# EAGLE board qo-100-pa-driver (EAGLE 9.6.2)
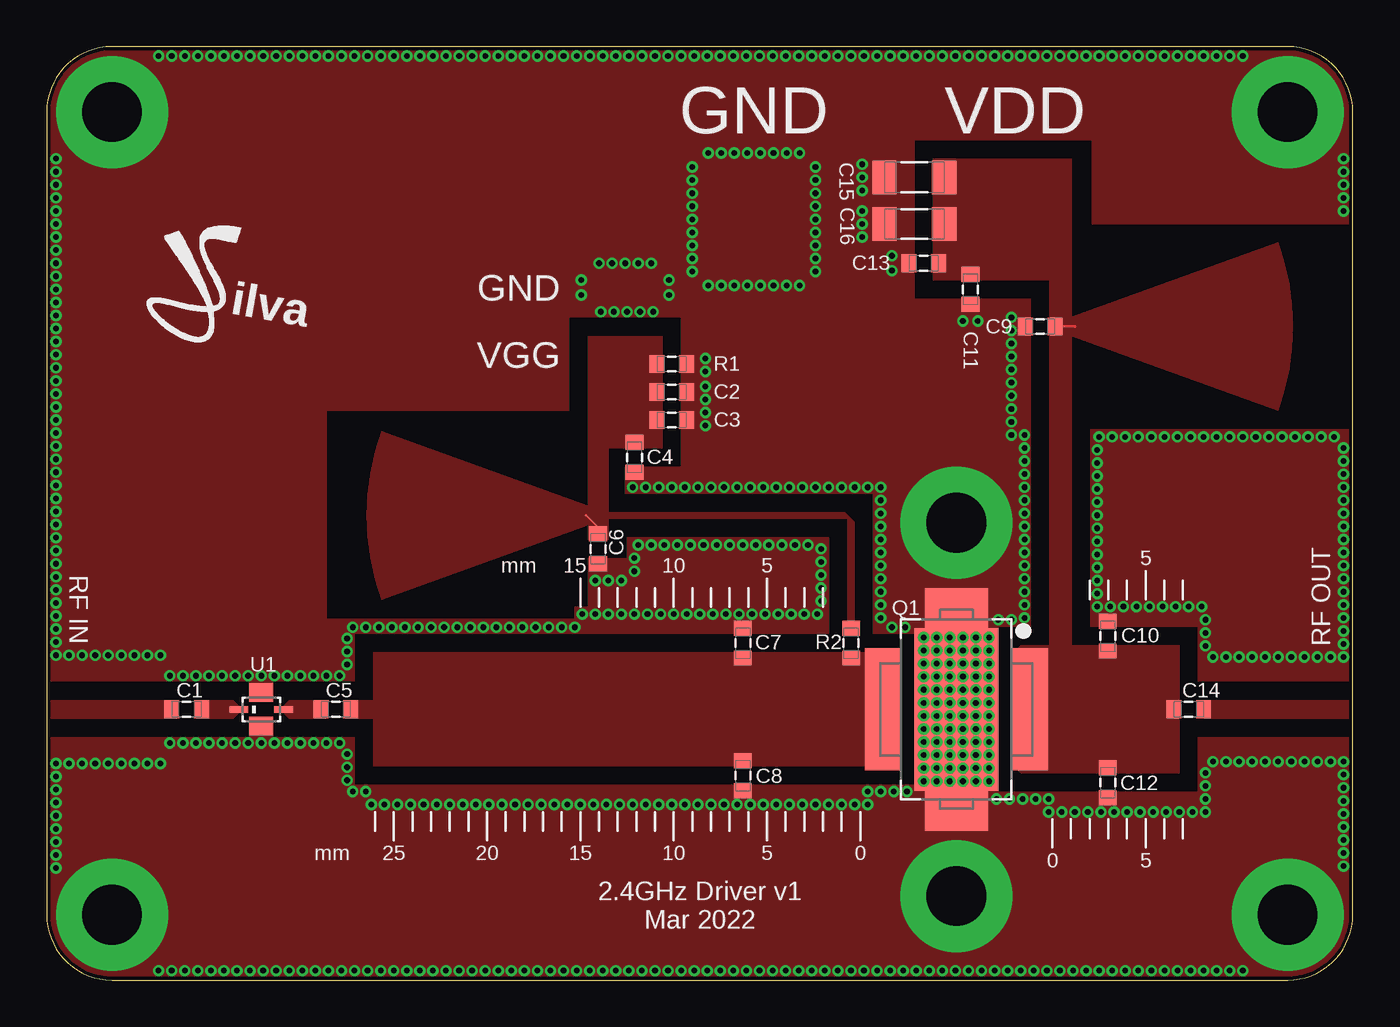
[diagram p0: board, top side]
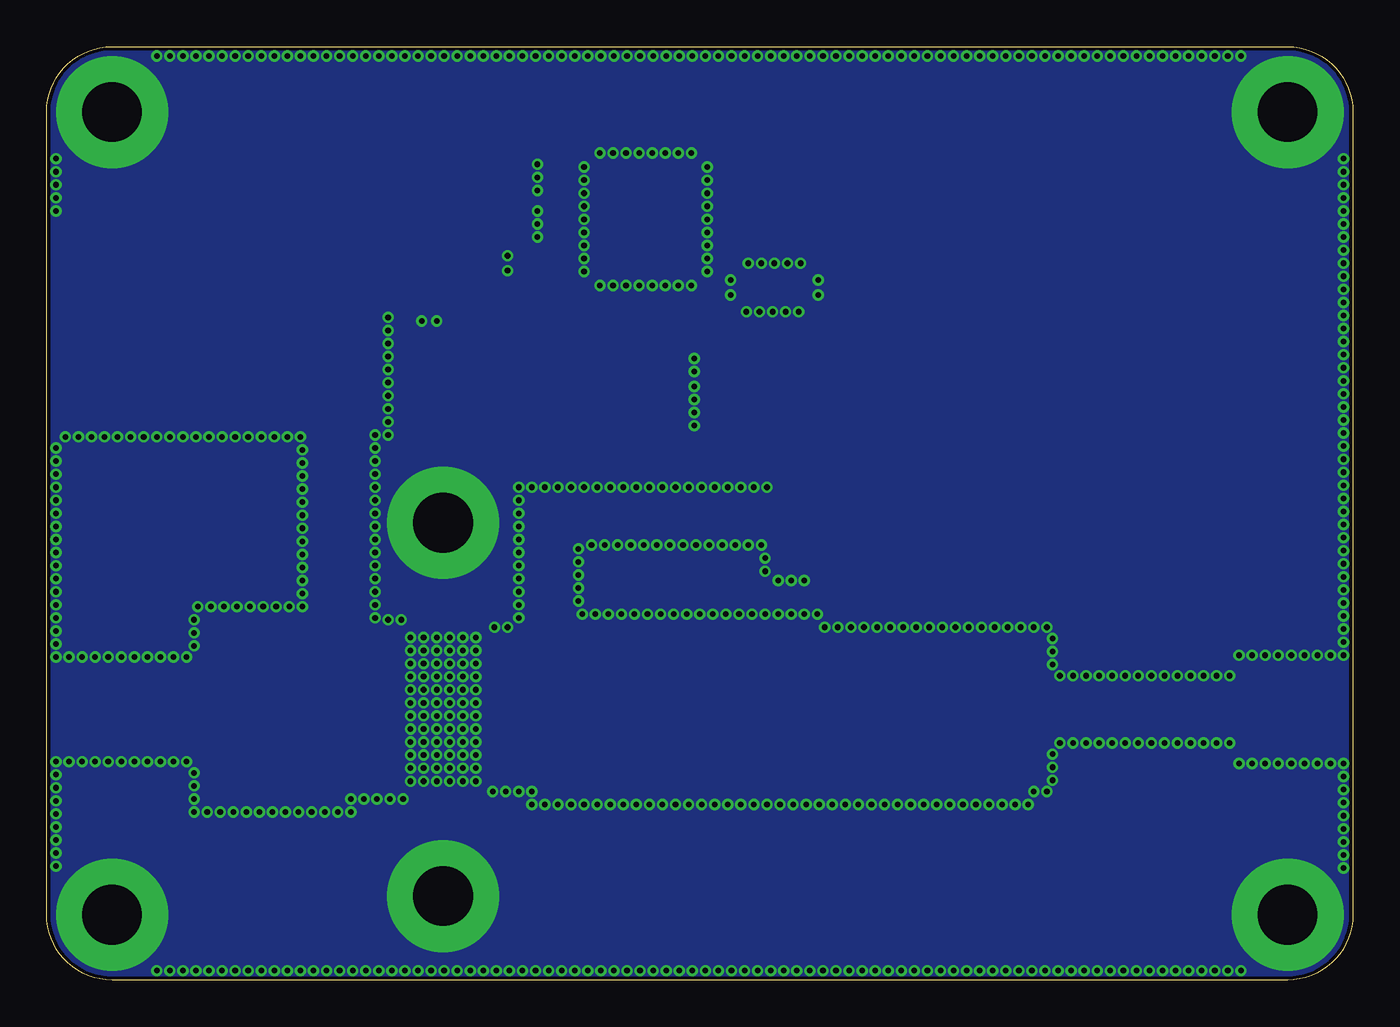
[diagram p1: board, bottom side, seen from below]

Size 70 x 50 mm. Coordinates in mm from the lower left corner, seen from the top.
Outline: 66.5,50 3.5,50 arc90 0,46.5 0,3.5 arc90 3.5,0 66.5,0 arc90 70,3.5 70,46.5 arc90 66.5,50
Copper layers (1*16): Top 0.035mm / dielectric 1.6mm / Bottom 0.035mm
Design rules "jlcpcb_2layer": minimum track width 5mil, minimum drill 0.3mm, track to track 5mil, track to pad 5mil, pad to pad 5mil, via to via 5mil, smd to smd 5mil, copper to edge 0.2mm, drill to drill 5mil, minimum pad ring 0.13mm, minimum via ring 0.1mm, stop-mask expansion 0.04mm, vias tented up to drill 10mm, thermal gap 5mil

## Footprints (pad centres in the part's own frame; a part is rotated, then mirrored left to right if it is on the bottom)
CAP0603 = smd 0.8 x 0.95: 1 -0.8,0; 2 0.8,0
CAP1206 = smd 1.3 x 1.8: 1 -1.6,0; 2 1.6,0
SOT1483-1 = smd 6.55 x 1.9: 1 0,-3.95; 2 0,3.95 | smd 2.4 x 3.38: 3@0 5.3,0; 3@1 -5.3,0 | smd 8.7 x 4.5: 3@2 0,0
RES0603 = smd 0.8 x 0.95: 1 -0.8,0; 2 0.8,0
2450BP15E0100 = smd 1.3 x 1: 1 0,0.9; 3 0,-0.9 | smd 1 x 0.35: 2 1.2,0; 4 -1.2,0

## Placement (x,y rotation side)
C1  12pF  [CAP0603]  7.5,14.5 0 top
C2  10uF  [CAP0603]  33.5,31.5 0 top
C3  100nF  [CAP0603]  33.5,30 0 top
C4  100pF  [CAP0603]  31.5,28 270 top
C5  12pF  [CAP0603]  15.5,14.5 0 top
C6  DNP  [CAP0603]  29.55,23.09 270 top
C7  2.2pF  [CAP0603]  37.31,18.05 90 top
C8  3.9pF  [CAP0603]  37.31,10.95 270 top
C9  DNP  [CAP0603]  53.24,35.01 180 top
C10  1.2pF  [CAP0603]  56.86,18.43 90 top
C11  100pF  [CAP0603]  49.5,37 270 top
C12  1.2pF  [CAP0603]  56.86,10.57 270 top
C13  100nF  [CAP0603]  47,38.4 180 top
C14  1.2pF  [CAP0603]  61.2,14.5 0 top
C15  10uF  [CAP1206]  46.5,43 180 top
C16  10uF  [CAP1206]  46.5,40.5 180 top
LOGO1  JS-5MM  [JS_5MM]  10.6,40.6 0 top
Q1  BLP9G0722-20G  [SOT1483-1]  48.75,14.5 90 top
R1  10K Ohms  [RES0603]  33.5,33 180 top
R2  10 Ohms  [RES0603]  43.11,18.05 90 top
U1  2450BP15E0100  [2450BP15E0100]  11.5,14.5 0 top

## Library data of the parts
C1-C14 = Capacitor
C15 C16 = Capacitor; VOLTAGE: 50V
LOGO1 = Silkscreen
Q1 = Ampleon
R1 R2 = Resistor
U1 = Generic Filter

## Nets
GND: C2.2 C3.2 C4.2 C6.2 C7.2 C8.2 C9.2 C10.2 C11.2 C12.2 C13.2 C15.2 C16.2 Q1.3@0 Q1.3@1 Q1.3@2 R1.1 U1.1 U1.3
N$2: C5.2 C7.1 C8.1 Q1.2 R2.1
N$5: C5.1 U1.2
N$6: C1.2 U1.4
RF_IN: C1.1
RF_OUT: C14.2
VDD: C9.1 C10.1 C11.1 C12.1 C13.1 C14.1 C15.1 C16.1 Q1.1
VGG: C2.1 C3.1 C4.1 C6.1 R1.2 R2.2

## Tracks (layer width: path | path; a pad name or v marks a point on that pad's centre or on a via)
GND  (via drill 0.3, 3.2 pad 6)
  other vias: 48.75,24.5 48.75,4.5 66.5,3.5 3.5,46.5 3.5,3.5 66.5,46.5 50.5,11.35 49.8,11.35 49.1,11.35 48.4,11.35 47.7,11.35 47,11.35 47,10.65 47.7,10.65 48.4,10.65 49.1,10.65 49.8,10.65 50.5,10.65 50.5,13.45 49.8,13.45 49.1,13.45 48.4,13.45 47.7,13.45 47,13.45 50.5,12.75 49.8,12.75 49.1,12.75 48.4,12.75 47.7,12.75 47,12.75 50.5,12.05 49.8,12.05 49.1,12.05 48.4,12.05 47.7,12.05 47,12.05 50.5,16.95 49.8,16.95 49.1,16.95 48.4,16.95 47.7,16.95 47,16.95 50.5,18.35 49.8,18.35 49.1,18.35 48.4,18.35 47.7,18.35 47,18.35 50.5,17.65 49.8,17.65 49.1,17.65 48.4,17.65 47.7,17.65 47,17.65 50.5,14.15 49.8,14.15 49.1,14.15 48.4,14.15 47.7,14.15 47,14.15 50.5,16.25 49.8,16.25 49.1,16.25 48.4,16.25 47.7,16.25 47,16.25 50.5,15.55 49.8,15.55 49.1,15.55 48.4,15.55 47.7,15.55 47,15.55 50.5,14.85 49.8,14.85 49.1,14.85 48.4,14.85 47.7,14.85 47,14.85 57.8,29.1 57.1,29.1 56.4,29.1 59.9,29.1 59.2,29.1 58.5,29.1 62,29.1 61.3,29.1 60.6,29.1 64.1,29.1 63.4,29.1 62.7,29.1 66.2,29.1 65.5,29.1 64.8,29.1 68.3,29.1 67.6,29.1 66.9,29.1 69.5,27.8 69.5,28.5 69,29.1 58.4,20 56.3,20 57,20 57.7,20 62.1,18.6 62.1,17.9 62.5,17.3 61.2,20 61.9,20 62.1,19.3 59.1,20 59.8,20 60.5,20 64.6,17.3 63.9,17.3 63.2,17.3 66.7,17.3 66,17.3 65.3,17.3 68.8,17.3 68.1,17.3 67.4,17.3 69.5,18.7 69.5,18 69.5,17.3 69.5,20.8 69.5,20.1 69.5,19.4 69.5,22.9 69.5,22.2 69.5,21.5 69.5,25 69.5,24.3 69.5,23.6 69.5,27.1 69.5,26.4 69.5,25.7 56.3,28.4 56.3,26.3 56.3,27 56.3,27.7 56.3,25.6 56.3,23.5 56.3,24.2 56.3,24.9 56.3,22.8 56.3,20.7 56.3,21.4 56.3,22.1 34.6,43.55 34.6,41.45 34.6,42.15 34.6,42.85 34.6,40.75 34.6,38.65 34.6,39.35 34.6,40.05 34.6,37.95 41.2,43.55 41.2,41.45 41.2,42.15 41.2,42.85 41.2,40.75 41.2,38.65 41.2,39.35 41.2,40.05 41.2,37.95 36.85,44.3 36.15,44.3 35.45,44.3 37.55,44.3 39.65,44.3 38.95,44.3 38.25,44.3 40.35,44.3 36.85,37.2 36.15,37.2 35.45,37.2 37.55,37.2 39.65,37.2 38.95,37.2 38.25,37.2 40.35,37.2 6.6,12.7 6.1,11.6 5.4,11.6 8.7,12.7 8,12.7 7.3,12.7 10.8,12.7 10.1,12.7 9.4,12.7 12.9,12.7 12.2,12.7 11.5,12.7 15,12.7 14.3,12.7 13.6,12.7 16.1,12.1 16.1,11.4 16.1,10.7 15.7,12.7 1.9,11.6 1.2,11.6 0.5,11.6 4,11.6 3.3,11.6 2.6,11.6 0.5,18.8 0.5,18.1 4.7,11.6 0.5,6 0.5,20.2 0.5,19.5 0.5,8.1 0.5,7.4 0.5,6.7 0.5,10.2 0.5,9.5 0.5,8.8 0.5,10.9 17.4,9.4 17.1,10.1 16.4,10.1 19.5,9.4 18.8,9.4 18.1,9.4 21.6,9.4 20.9,9.4 20.2,9.4 23.7,9.4 23,9.4 22.3,9.4 25.8,9.4 25.1,9.4 24.4,9.4 27.9,9.4 27.2,9.4 26.5,9.4 28.6,9.4 30.7,9.4 30,9.4 29.3,9.4 32.8,9.4 32.1,9.4 31.4,9.4 34.9,9.4 34.2,9.4 33.5,9.4 37,9.4 36.3,9.4 35.6,9.4 39.1,9.4 38.4,9.4 37.7,9.4 41.2,9.4 40.5,9.4 39.8,9.4 41.9,9.4 44.7,10.1 44,10.1 42.6,9.4 43.3,9.4 46.1,10.1 45.4,10.1 51.6,9.7 50.9,9.7 53.7,9.7 53.7,9 53,9.7 52.3,9.7 55.8,9 55.1,9 54.4,9 57.9,9 57.2,9 56.5,9 58.6,9 60.7,9 60,9 59.3,9 62.1,9.7 61.4,9 62.1,9 62.5,11.7 62.1,11.1 62.1,10.4 64.6,11.7 63.9,11.7 63.2,11.7 66.7,11.7 66,11.7 65.3,11.7 68.8,11.7 68.1,11.7 67.4,11.7 69.5,11.7 6.1,17.4 5.4,17.4 1.9,17.4 1.2,17.4 0.5,17.4 4,17.4 3.3,17.4 2.6,17.4 4.7,17.4 16.1,18.3 16.1,17.6 16.1,16.9 6.6,16.3 8.7,16.3 8,16.3 7.3,16.3 10.8,16.3 10.1,16.3 9.4,16.3 12.9,16.3 12.2,16.3 11.5,16.3 15,16.3 14.3,16.3 13.6,16.3 15.7,16.3 30.8,19.6 32.9,19.6 32.2,19.6 31.5,19.6 35,19.6 34.3,19.6 33.6,19.6 37.1,19.6 36.4,19.6 35.7,19.6 39.2,19.6 38.5,19.6 37.8,19.6 41.3,19.6 40.6,19.6 39.9,19.6 41.5,20.3 17.8,18.9 41.5,21.7 41.5,21 19.9,18.9 19.2,18.9 18.5,18.9 22,18.9 21.3,18.9 20.6,18.9 24.1,18.9 23.4,18.9 22.7,18.9 26.2,18.9 25.5,18.9 24.8,18.9 28.3,18.9 27.6,18.9 26.9,18.9 28.7,19.6 29.4,19.6 30.1,19.6 17.1,18.9 16.4,18.9 6,0.5 8.1,0.5 7.4,0.5 6.7,0.5 10.2,0.5 9.5,0.5 8.8,0.5 12.3,0.5 11.6,0.5 10.9,0.5 14.4,0.5 13.7,0.5 13,0.5 16.5,0.5 15.8,0.5 15.1,0.5 17.2,0.5 29.4,21.4 30.1,21.4 30.8,21.4 31.7,23.3 31.5,22.6 31.5,21.9 33.8,23.3 33.1,23.3 32.4,23.3 35.9,23.3 35.2,23.3 34.5,23.3 41.5,23.1 37.3,23.3 36.6,23.3 40.1,23.3 40.8,23.3 41.5,22.4 39.4,23.3 38.7,23.3 38,23.3 17.9,0.5 20,0.5 19.3,0.5 18.6,0.5 22.1,0.5 21.4,0.5 20.7,0.5 24.2,0.5 23.5,0.5 22.8,0.5 26.3,0.5 25.6,0.5 24.9,0.5 28.4,0.5 27.7,0.5 27,0.5 29.1,0.5 53.6,0.5 55.7,0.5 55,0.5 54.3,0.5 57.8,0.5 57.1,0.5 56.4,0.5 59.9,0.5 59.2,0.5 58.5,0.5 60.6,0.5 61.3,0.5 63.4,0.5 62.7,0.5 62,0.5 64.1,0.5 29.8,0.5 31.9,0.5 31.2,0.5 30.5,0.5 34,0.5 33.3,0.5 32.6,0.5 36.1,0.5 35.4,0.5 34.7,0.5 38.2,0.5 37.5,0.5 36.8,0.5 40.3,0.5 39.6,0.5 38.9,0.5 41,0.5 41.7,0.5 43.8,0.5 43.1,0.5 42.4,0.5 45.9,0.5 45.2,0.5 44.5,0.5 48,0.5 47.3,0.5 46.6,0.5 50.1,0.5 49.4,0.5 48.7,0.5 52.2,0.5 51.5,0.5 50.8,0.5 52.9,0.5 0.5,44 0.5,43.3 0.5,37.7 0.5,39.8 0.5,39.1 0.5,38.4 0.5,41.9 0.5,41.2 0.5,40.5 0.5,42.6 0.5,32.1 0.5,34.2 0.5,33.5 0.5,32.8 0.5,36.3 0.5,35.6 0.5,34.9 0.5,37 0.5,26.5 0.5,28.6 0.5,27.9 0.5,27.2 0.5,30.7 0.5,30 0.5,29.3 0.5,31.4 0.5,20.9 0.5,23 0.5,22.3 0.5,21.6 0.5,25.1 0.5,24.4 0.5,23.7 0.5,25.8 69.5,41.2 69.5,43.3 69.5,42.6 69.5,41.9 69.5,44 44.7,19.4 45.3,18.9 46,18.9 44.7,21.5 44.7,20.8 44.7,20.1 44.7,23.6 44.7,22.9 44.7,22.2 41.2,26.4 40.5,26.4 44.7,24.3 43.3,26.4 42.6,26.4 41.9,26.4 44,26.4 44.7,26.4 31.4,26.4 44.7,25 44.7,25.7 33.5,26.4 32.8,26.4 32.1,26.4 35.6,26.4 34.9,26.4 34.2,26.4 37.7,26.4 37,26.4 36.3,26.4 39.8,26.4 39.1,26.4 38.4,26.4 35.3,29.7 35.3,31.8 35.3,31.1 35.3,30.4 51,19.3 51.7,19.3 52.4,19.4 52.4,20.1 52.4,22.2 52.4,21.5 52.4,20.8 52.4,24.3 52.4,23.6 52.4,22.9 52.4,26.4 52.4,25.7 52.4,25 52.4,28.5 52.4,27.8 52.4,27.1 51.7,30.6 51.7,29.9 52.4,29.2 51.7,31.3 51.7,32 51.7,34.1 51.7,33.4 51.7,32.7 51.7,29.2 45.3,38 45.3,38.8 51.7,34.8 49.1,35.3 49.9,35.3 51.7,35.5 69.5,6.8 69.5,6.1 69.5,8.9 69.5,8.2 69.5,7.5 69.5,11 69.5,10.3 69.5,9.6 44,9.4 33.35,36.7 28.65,37.5 28.65,36.7 33.35,37.5 29.6,38.4 31.7,38.4 31,38.4 30.3,38.4 32.4,38.4 29.7,35.8 31.8,35.8 31.1,35.8 30.4,35.8 32.5,35.8 43.7,40.5 43.7,39.8 43.7,41.2 43.7,43 43.7,42.3 43.7,43.7 6,49.5 8.1,49.5 7.4,49.5 6.7,49.5 10.2,49.5 9.5,49.5 8.8,49.5 12.3,49.5 11.6,49.5 10.9,49.5 14.4,49.5 13.7,49.5 13,49.5 16.5,49.5 15.8,49.5 15.1,49.5 17.2,49.5 17.9,49.5 20,49.5 19.3,49.5 18.6,49.5 22.1,49.5 21.4,49.5 20.7,49.5 24.2,49.5 23.5,49.5 22.8,49.5 26.3,49.5 25.6,49.5 24.9,49.5 28.4,49.5 27.7,49.5 27,49.5 29.1,49.5 53.6,49.5 55.7,49.5 55,49.5 54.3,49.5 57.8,49.5 57.1,49.5 56.4,49.5 59.9,49.5 59.2,49.5 58.5,49.5 60.6,49.5 61.3,49.5 63.4,49.5 62.7,49.5 62,49.5 64.1,49.5 29.8,49.5 31.9,49.5 31.2,49.5 30.5,49.5 34,49.5 33.3,49.5 32.6,49.5 36.1,49.5 35.4,49.5 34.7,49.5 38.2,49.5 37.5,49.5 36.8,49.5 40.3,49.5 39.6,49.5 38.9,49.5 41,49.5 41.7,49.5 43.8,49.5 43.1,49.5 42.4,49.5 45.9,49.5 45.2,49.5 44.5,49.5 48,49.5 47.3,49.5 46.6,49.5 50.1,49.5 49.4,49.5 48.7,49.5 52.2,49.5 51.5,49.5 50.8,49.5 52.9,49.5 35.3,33.3 35.3,32.6
  pour Bottom (rank 6, no thermals): -1,-1 71,-1 71,51 -1,51
  pour Top (no thermals): 0,13 0,3.5 arc90 3.5,0 66.5,0 arc90 70,3.5 70,13 61.7,13 61.7,10.07 51,10.07 51,10.45 16.5,10.45 16.5,13 12.15,13 12.15,14 10.85,14 10.85,13
  pour Top (no thermals): 70,29.5 55.94,29.5 55.94,18.93 61.7,18.93 61.7,16 70,16
  pour Top (no thermals): 41.92,18.55 41.92,23.71 31.1,23.71 31.1,22.59 29,22.59 29,20 28.3,20 28.3,19.35 15,19.35 15,30.5 28,30.5 28,35.5 34,35.5 34,27.5 31,27.5 31,26.06 44.28,26.06 44.28,18.55 46.5,18.55 46.5,18.5 51,18.5 51,18.93 52.74,18.93 52.74,36.5 46.5,36.5 46.5,45 56,45 56,40.5 70,40.5 70,46.5 arc90 66.5,50 3.5,50 arc90 0,46.5 0,16 10.85,16 10.85,15 12.15,15 12.15,16 16.5,16 16.5,18.55
N$2
  pour Top (no thermals): 16,15 17.5,15 17.5,17.55 45.66,17.55 45.66,11.45 17.5,11.45 17.5,14 16,14
N$5
  pour Top (no thermals): 15,14 15,15 13,15 12.5,14.5 13,14
N$6
  pour Top (no thermals): 8,15 8,14 10,14 10.5,14.5 10,15
RF_IN
  pour Top (no thermals): 0,14 7,14 7,15 0,15
RF_OUT
  pour Top (no thermals): 70,15 62,15 62,14 70,14
VDD
  Top 0.127: C9.1 55.09,35.01 55.1,35
  pour Top (no thermals): 60.7,11.07 52.2,11.07 52,11.28 52,17.73 52.2,17.93 53.74,17.93 53.74,37.5 47.5,37.5 47.5,44 54.94,44 54.94,17.93 60.7,17.93
  pour Top: 66,30.5 54.94,34.48 54.94,35.53 66,39.52 66.34,38.42 66.58,37.3 66.73,36.16 66.78,35.01 66.73,33.86 66.58,32.72 66.34,31.6
VGG
  Top 0.127: C6.1 29.55,24.25 28.9,24.9
  pour Top: 17.21,26.03 17.16,24.89 17.21,23.74 17.36,22.6 17.6,21.48 17.95,20.38 29,24.36 29,25.41 17.95,29.39 17.6,28.29 17.36,27.17
  pour Top (no thermals): 42.92,18.7 42.92,24.71 30.1,24.71 30.1,23.59 29,23.59 29,34.5 33,34.5 33,28.5 30.1,28.5 30.1,25.06 42.78,25.06 43.28,24.55 43.28,18.7

## Text on the board
tPlace: GND | VDD | GND | ilva | VGG | 5 | mm | 15 | 10 | 5 | RF IN | RF OUT | mm | 25 | 20 | 15 | 10 | 5 | 0 | 0 | 5 | 2.4GHz Driver v1 / Mar 2022